# EAGLE board board (EAGLE 7.6.0)

Size 56.82 x 53.33 mm. Coordinates in mm from the lower left corner, seen from the top.
Outline: 0,0 56.82,0 56.82,53.33 0,53.33 0,0
Copper layers (1*16): Top 0.035mm / dielectric 1.5mm / Bottom 0.035mm
Design rules "default": minimum track width 10mil, minimum drill 24mil, track to track 8mil, track to pad 8mil, pad to pad 8mil, via to via 8mil, smd to smd 8mil, copper to edge 40mil, drill to drill 8mil, minimum pad ring 10mil, minimum via ring 8mil, stop-mask expansion 4mil, vias tented up to drill 0mil, thermal gap 10mil

## Footprints (pad centres in the part's own frame; a part is rotated, then mirrored left to right if it is on the bottom)
RADIAL-D11.36MM = drill 1.27 pad 1.905 square: + -2.54,0 | drill 1.27 pad 1.905: - 2.54,0
C5B2.5 = drill 0.813 pad 1.6 octagon: 1 -2.54,0; 2 2.54,0
LED5MM = drill 0.813 octagon: A -1.27,0; K 1.27,0
1X06 = drill 1.016 octagon: 1 -6.35,0; 2 -3.81,0; 3 -1.27,0; 4 1.27,0; 5 3.81,0; 6 6.35,0
2P-2.54-65/35MIL = drill 0.889 pad 1.651 square: 1 0,1.27 | drill 0.889 pad 1.651: 2 0,-1.27
0207/10 = drill 0.813 octagon: 1 -5.08,0; 2 5.08,0
TL1105 = drill 1 pad 1.676: 1 -2.25,3.25; 2 2.25,3.25; 3 -2.25,-3.25; 4 2.25,-3.25
DIL08 = drill 0.813 pad 1.27: 1 -3.81,-3.81; 2 -1.27,-3.81; 3 1.27,-3.81; 4 3.81,-3.81; 5 3.81,3.81; 6 1.27,3.81; 7 -1.27,3.81; 8 -3.81,3.81

## Placement (x,y rotation side)
C1  1000uF  [RADIAL-D11.36MM]  5,98.98 0 top  (outside the outline)
C2  0.1uF  [C5B2.5]  5,149.78 0 top  (outside the outline)
D1  [LED5MM]  5,73.58 0 top  (outside the outline)
LED1  [1X06]  5,35.48 0 top
LED2  [1X06]  5,48.18 0 top
LED3  [1X06]  5,60.88 0 top  (outside the outline)
P1  5V  [2P-2.54-65/35MIL]  5,22.78 0 top
R1  1k‎Ω  [0207/10]  5,86.28 0 top  (outside the outline)
R2  300‎Ω  [0207/10]  5,111.68 0 top  (outside the outline)
R3  10k‎Ω  [0207/10]  5,124.38 0 top  (outside the outline)
S1  [TL1105]  5,137.08 0 top  (outside the outline)
U1  [DIL08]  5,10.08 0 top

## Library data of the parts
C1 C2 D1 LED1-LED3 P1 R1-R3 S1 U1 = AUTODESK_CIRCUITS_BREADBOARD

## Nets
N$1: U1.6
N$2: D1.K R1.2
N$3: C1.+ C2.2 LED3.3 P1.2 R3.2 U1.8
N$4: D1.A U1.3
N$5: R2.2 U1.2
N$6: LED1.3 LED2.4
N$7: LED2.3 LED3.4
N$8: LED1.2 LED2.5
N$9: LED2.2 LED3.5
N$10: LED1.1 LED2.6
N$11: LED2.1 LED3.6
N$12: S1.4
N$13: R3.1 S1.1 U1.7
N$14: S1.3
N$15: LED1.6 R2.1
N$16: U1.5
N$17: U1.1
N$18: C1.- C2.1 LED3.2 P1.1 R1.1 S1.2 U1.4

## Tracks (layer width: path | path; a pad name or v marks a point on that pad's centre or on a via)
N$2  (1 unrouted)
N$3  (5 unrouted)
N$4  (1 unrouted)
N$5  (1 unrouted)
N$6  (1 unrouted)
N$7  (1 unrouted)
N$8  (1 unrouted)
N$9  (1 unrouted)
N$10  (1 unrouted)
N$11  (1 unrouted)
N$13  (2 unrouted)
N$15  (1 unrouted)
N$18  (6 unrouted)